# Altium PCB PCB1.PcbDoc (part 1 of 2)
Units mil, origin at the board's own origin, x right, y up, seen from the top; angles counter-clockwise.
Board outline 3190 x 3156 mil, 4 copper layers (Component Side, Ground Plane, Power Plane, Solder Side), stack 33.234 mil thick; 104 components, 96 nets, 451 pads, 130 vias.
Unrouted connection lines stored in the file: 23.
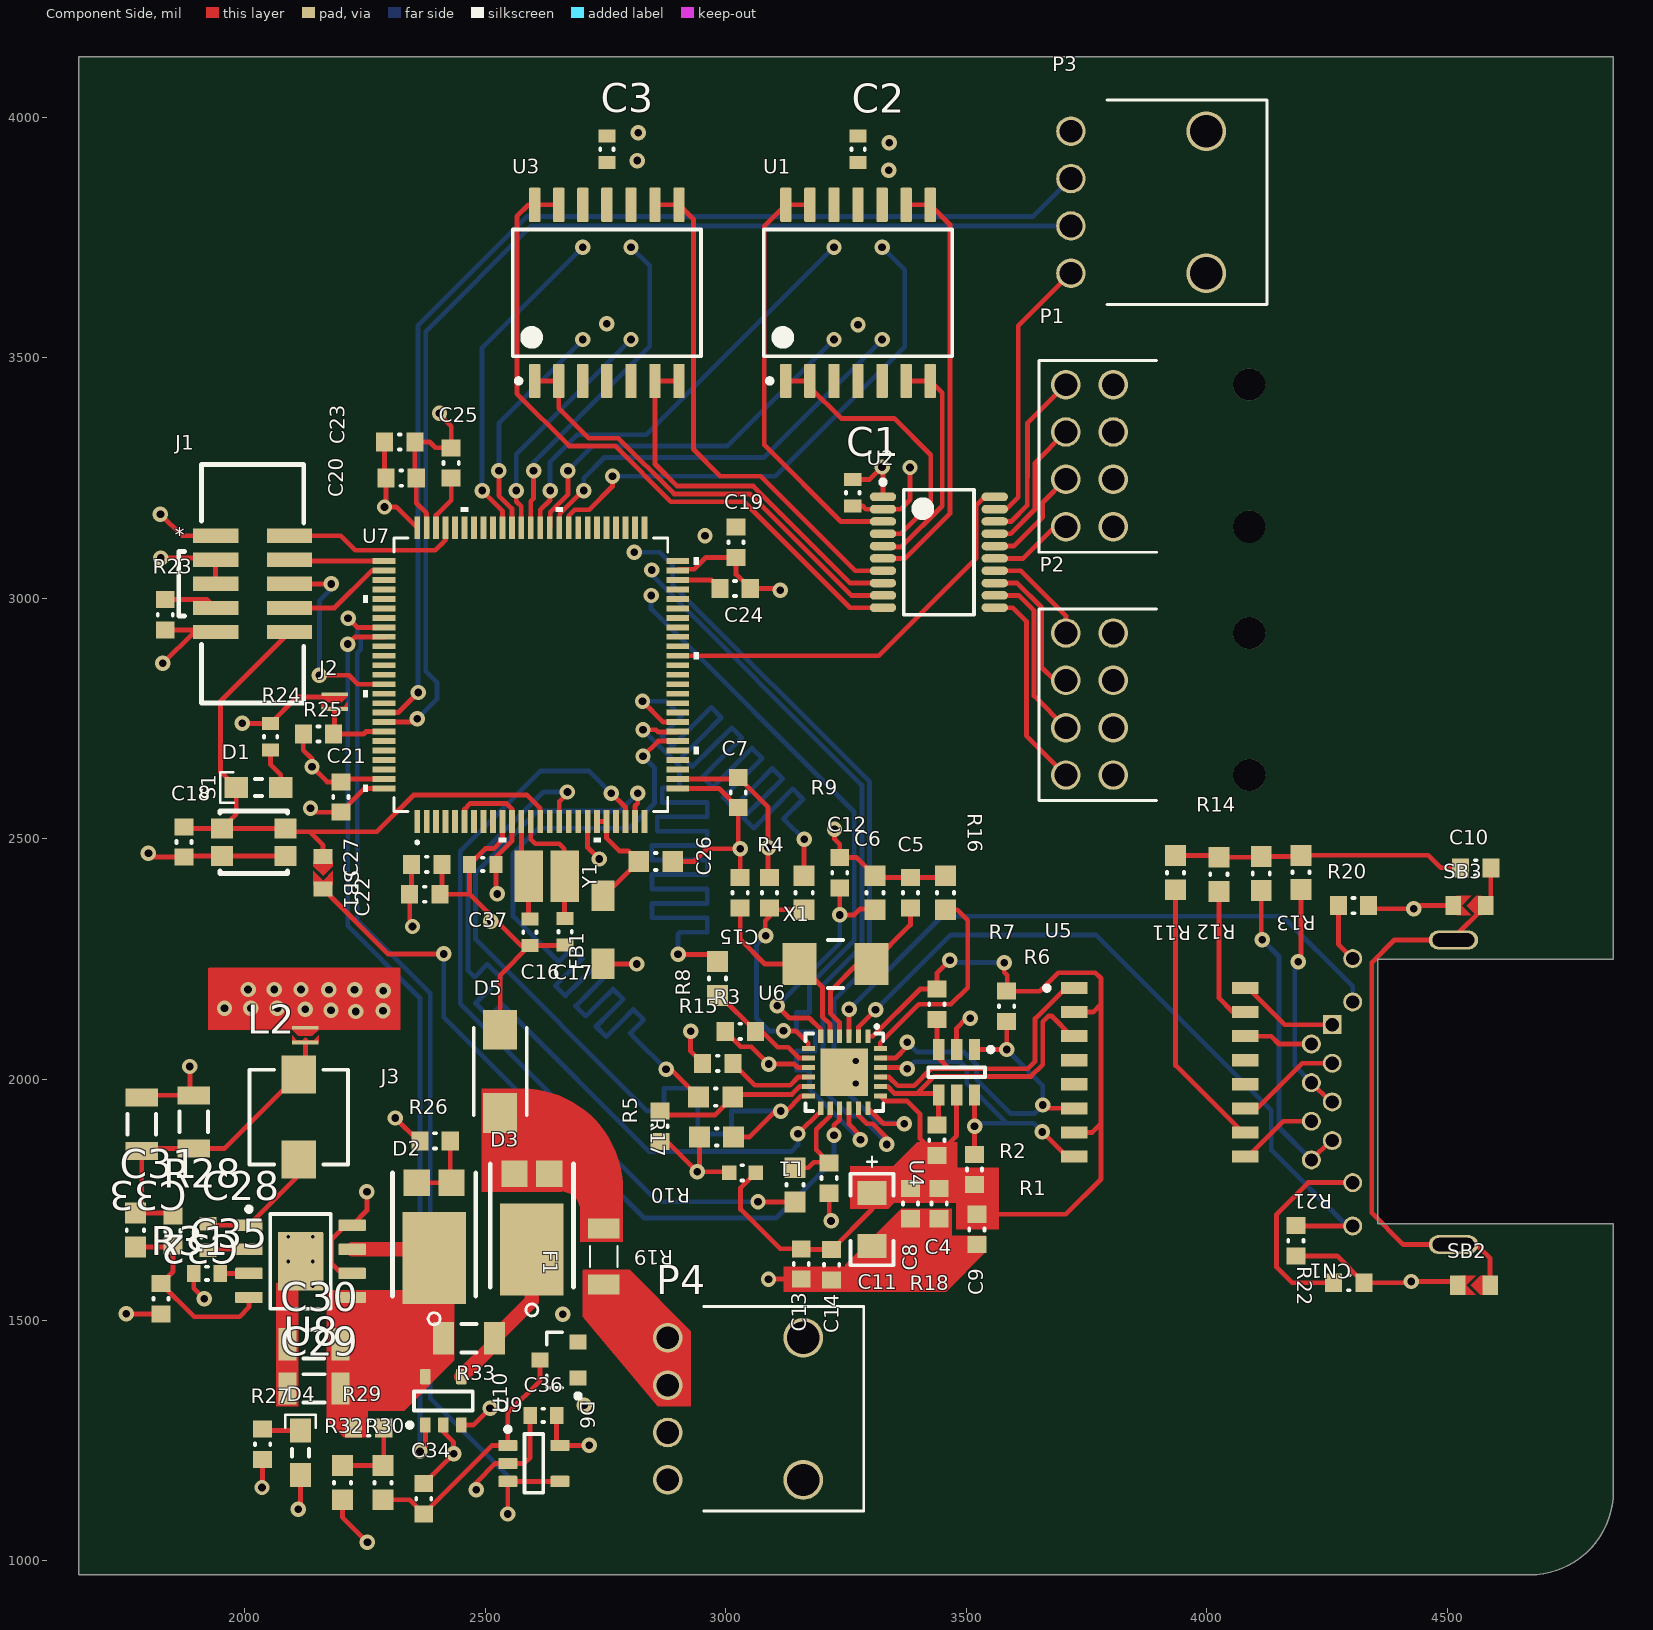
[diagram p0: Component Side view]
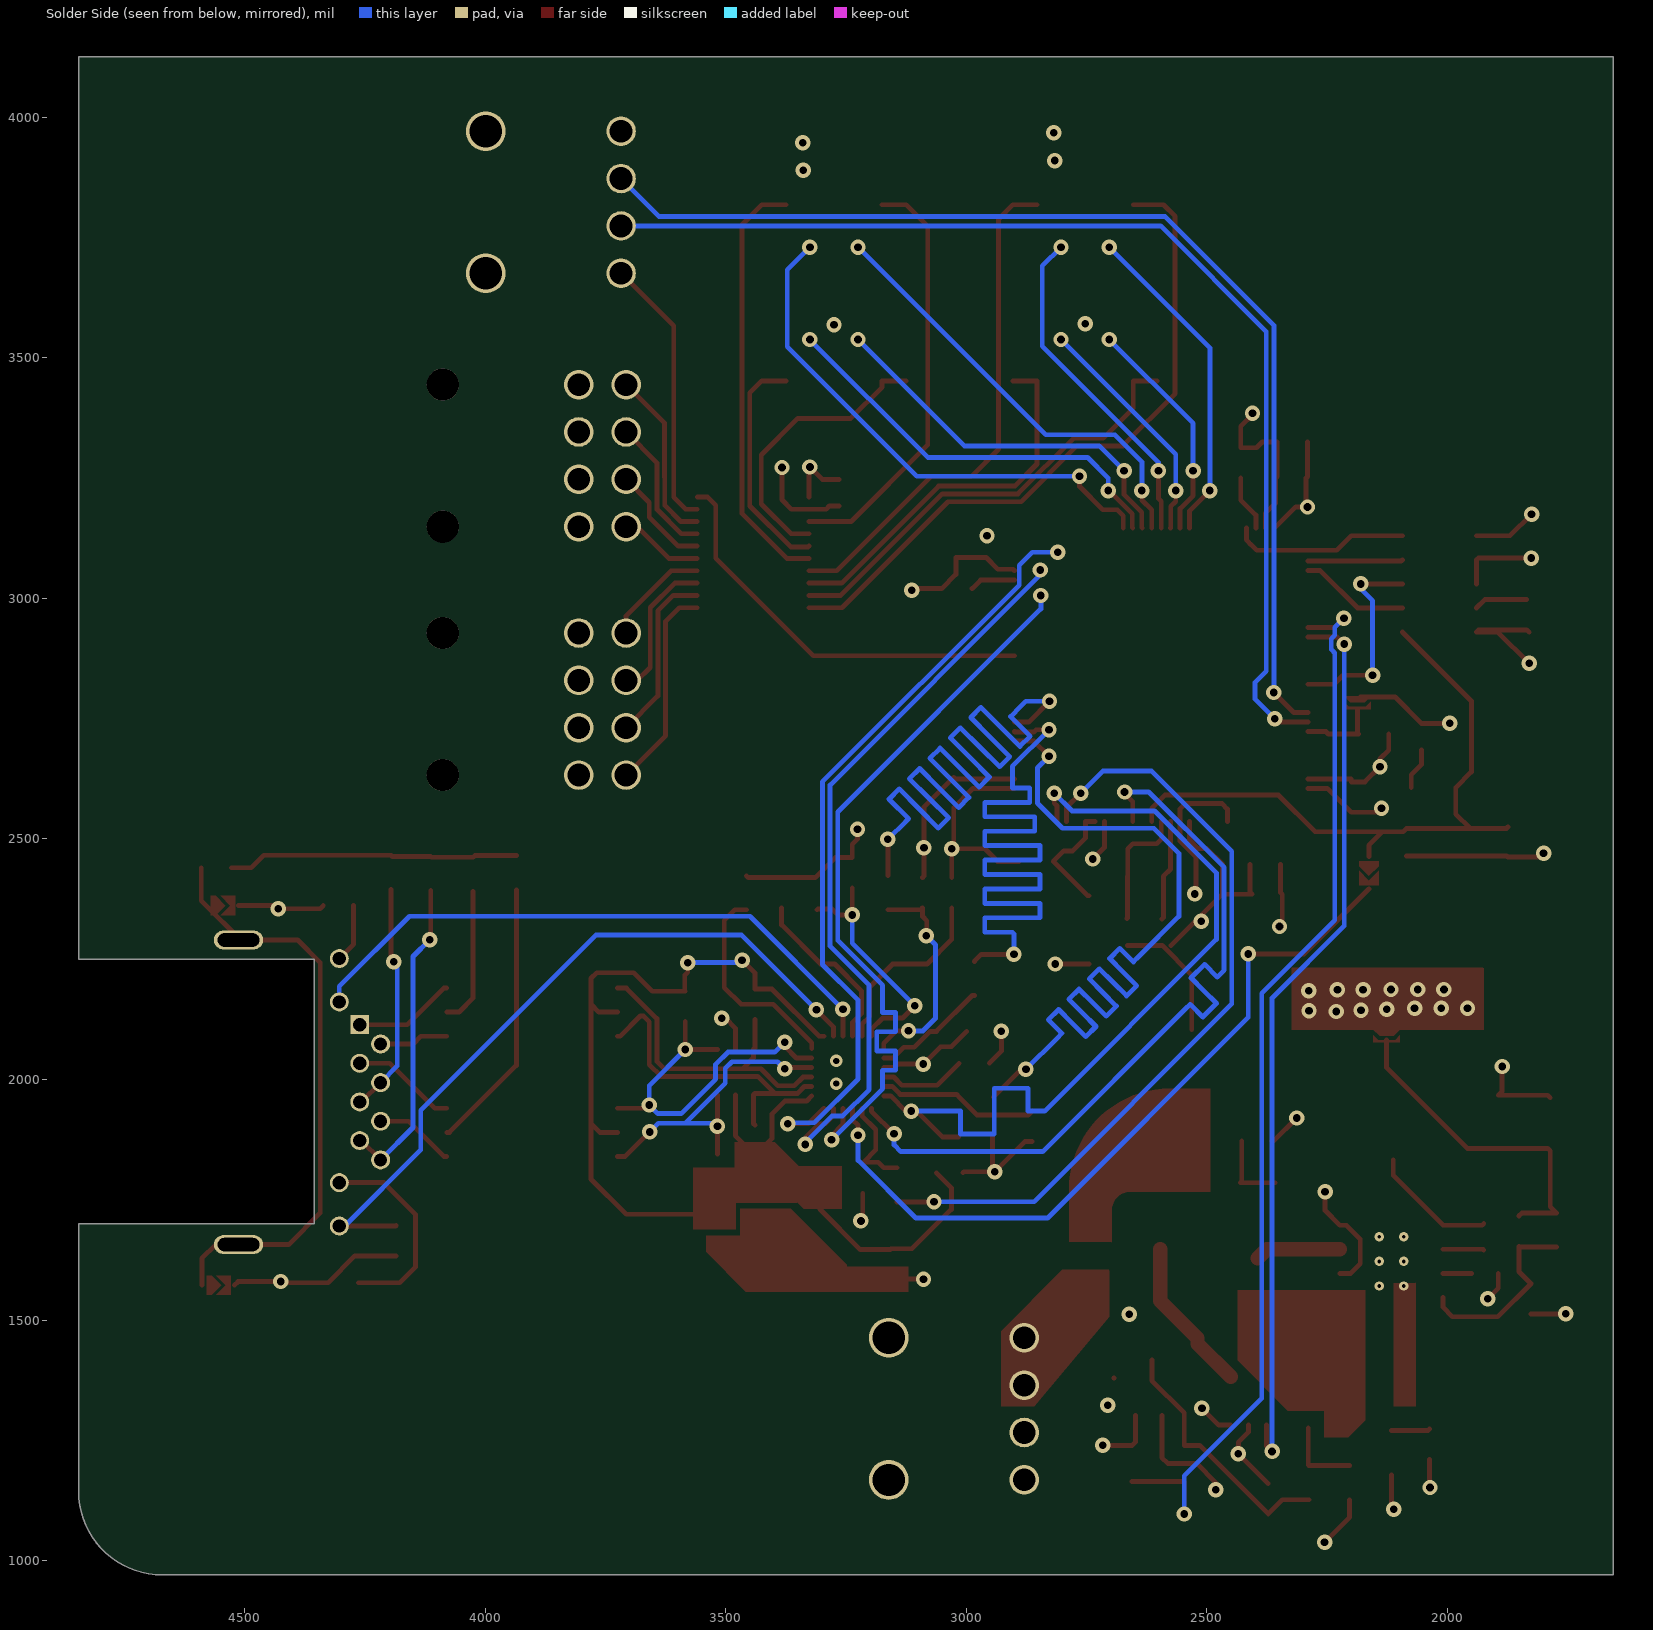
[diagram p1: Solder Side view, seen from below]
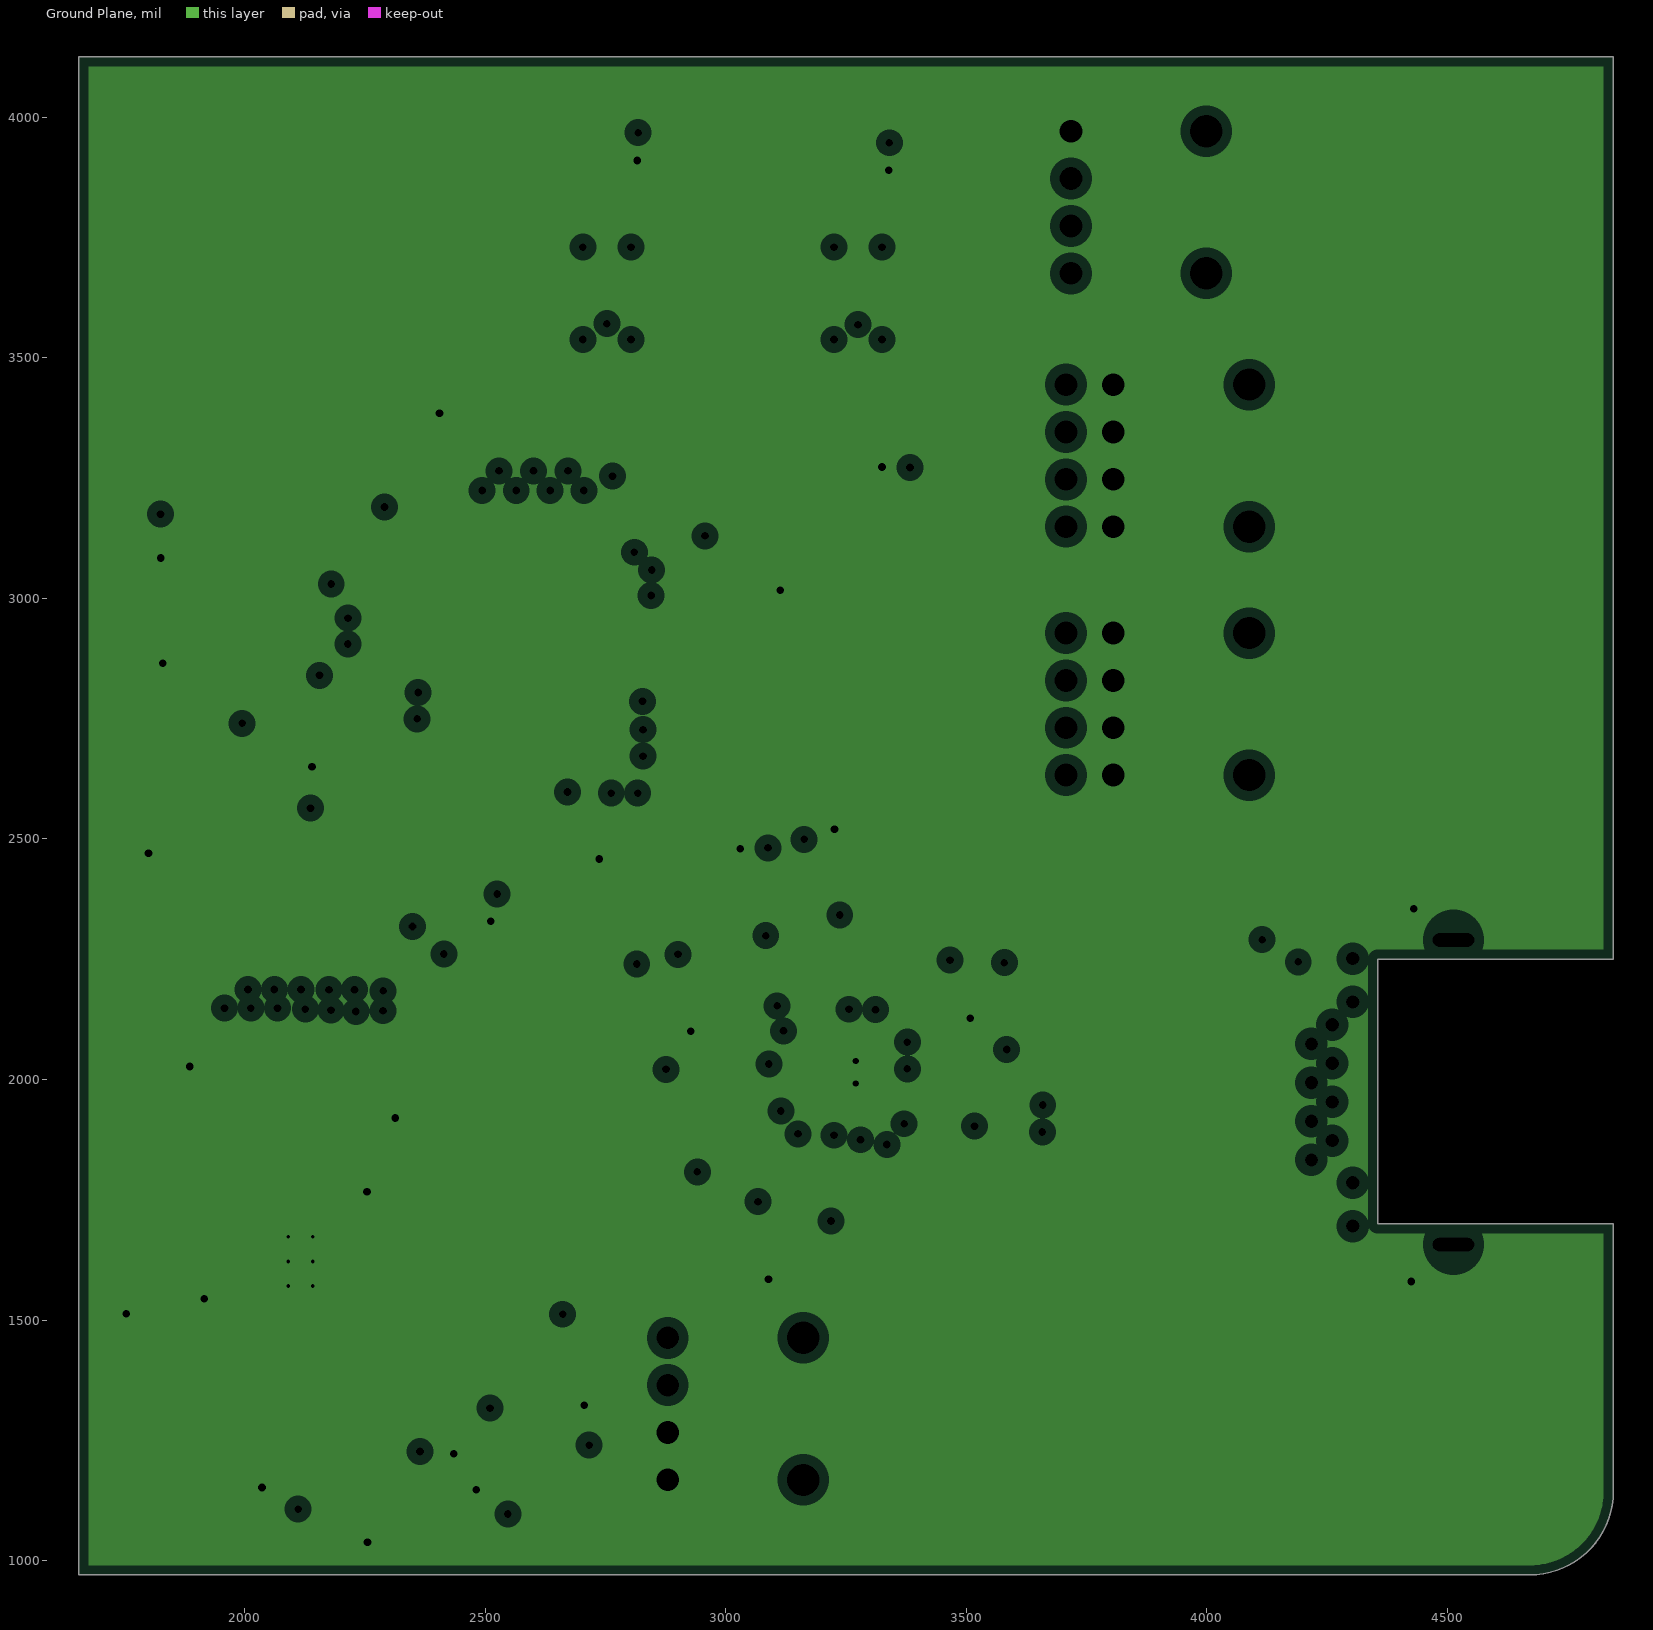
[diagram p2: Ground Plane, clearances drawn from the general rule]
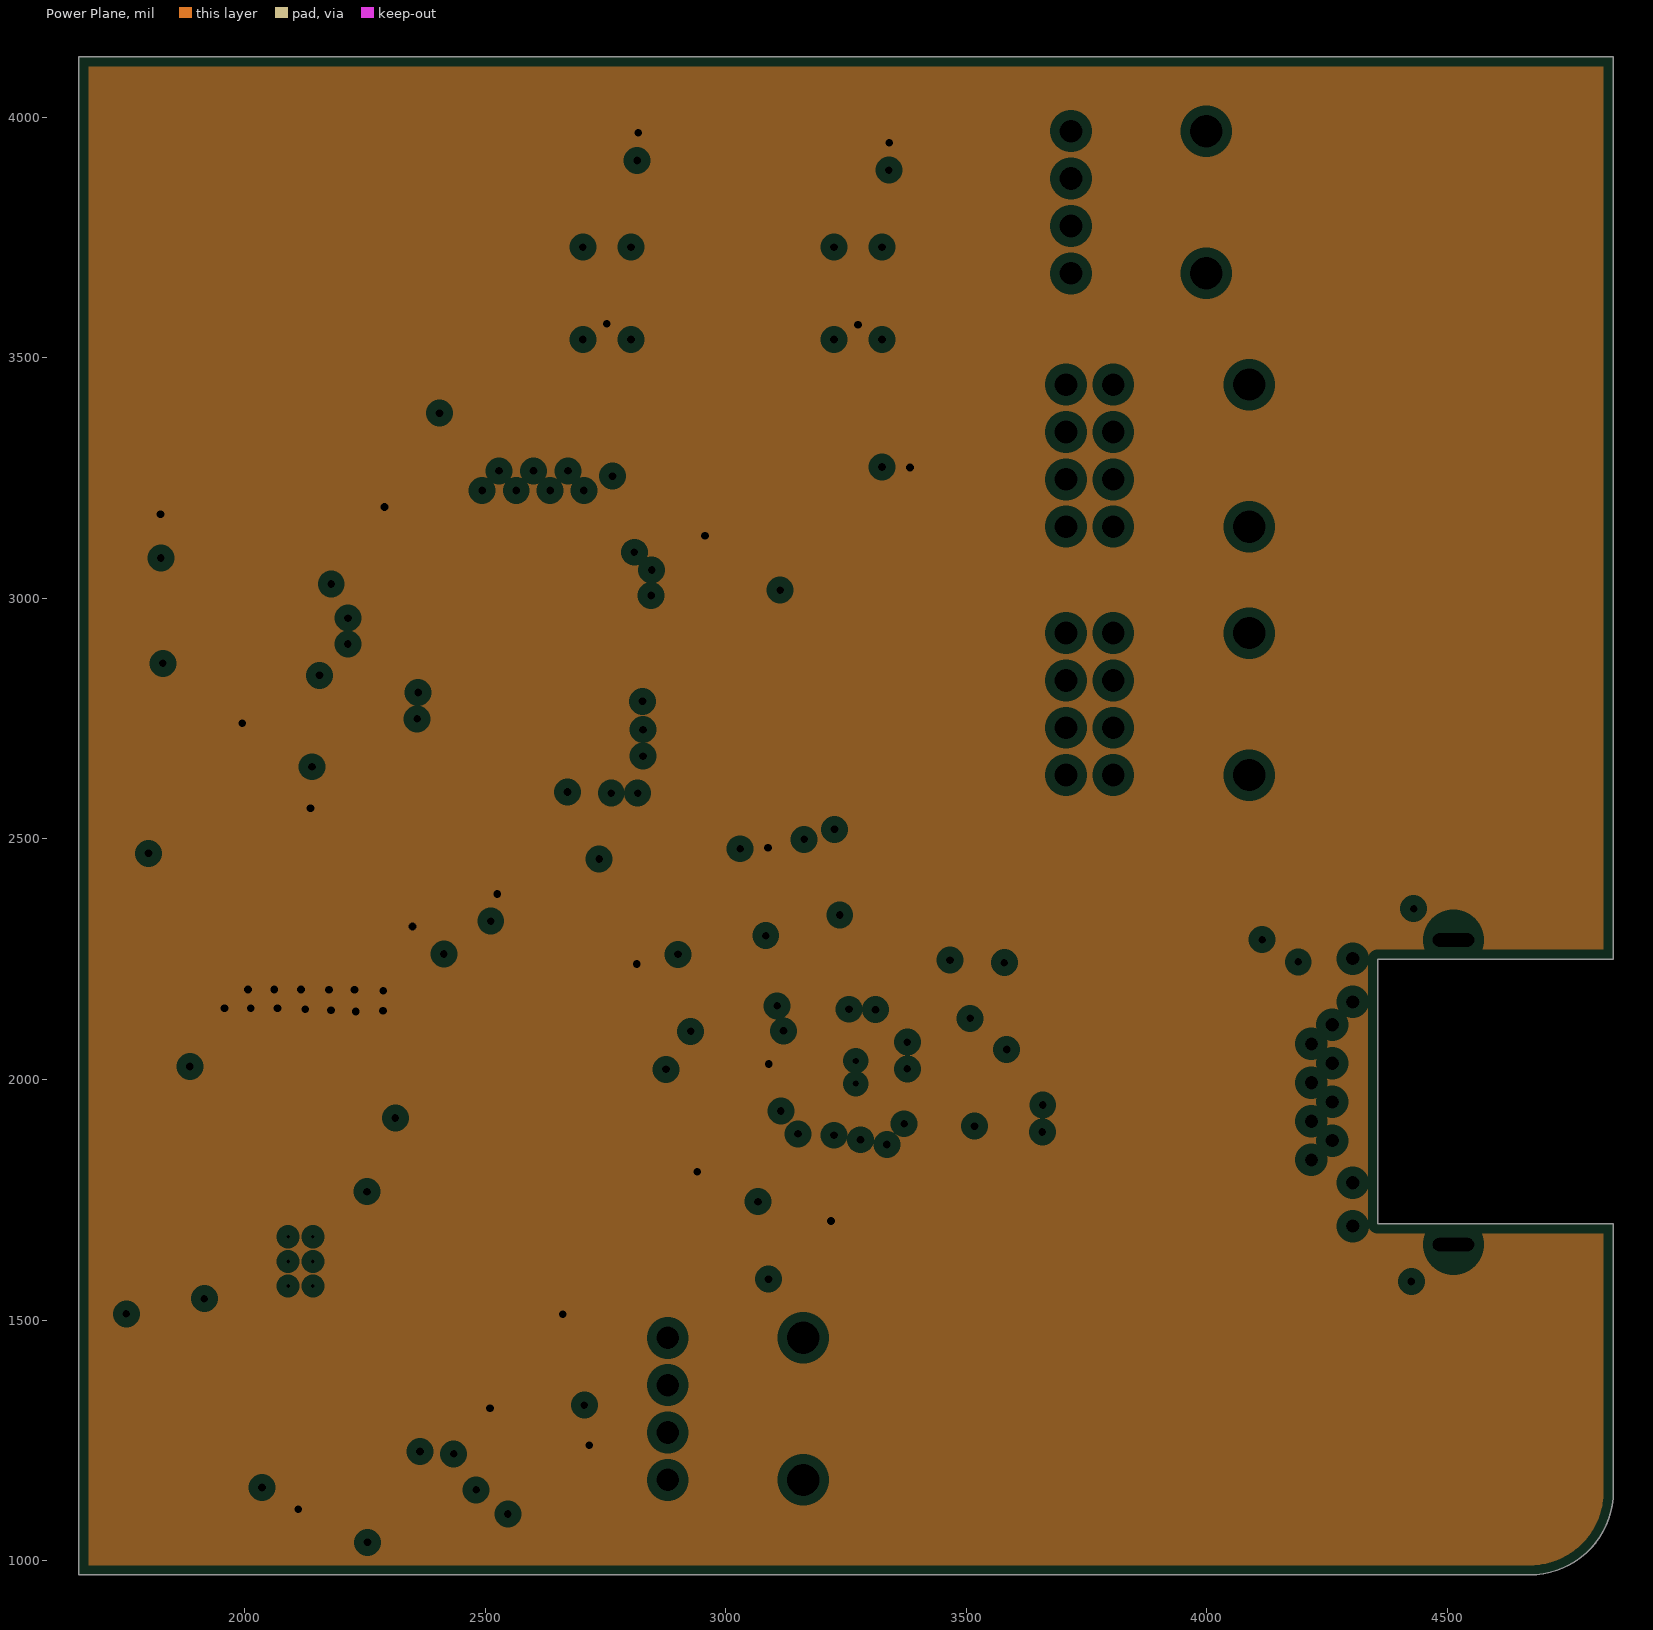
[diagram p3: Power Plane, clearances drawn from the general rule]

## Layer stack, top to bottom
Top Solder: solder mask 0.4, Solder Resist, Dk 3.5
Component Side: signal copper 1.4
Dielectric 1: core 12.6, FR-4, Dk 4.8
Ground Plane: plane copper 1.417, net GND
Dielectric 3: prepreg 5, Dk 4.2
Power Plane: plane copper 1.417, net VCC_3V3
Dielectric 4: core 10, Dk 4.2
Solder Side: signal copper 1.4
Bottom Solder: solder mask 0.4, Solder Resist, Dk 3.5

## Board outline
4845,1700 4355,1700 4355,2250 4845,2250 4845,4126 1655,4126 1655,970 4671,970 ccw(c4671,1144) 4845,1144

## Design rules (kind name [scope] priority, off if disabled: settings)
Clearance [All] p1: gap=0 ignorepadtopadclearanceinfootprint=TRUE except(6: Arc-Arc Arc-Track Arc-SMDPad Arc-Via Track-Track Track-SMDPad Track-Via SMDPad-SMDPad SMDPad-Via; 7: THPad-Fill THPad-Poly THPad-Region Via-Fill Via-Poly Via-Region; 10: Arc-THPad Arc-Text Track-THPad Track-Text SMDPad-THPad SMDPad-Text THPad-THPad THPad-Via THPad-Text Via-Via Via-Text Fill-Text Poly-Text Region-Text Text-Text)
DiffPairsRouting [All] p1: maxlimit=10 minlimit=5 mostfreqgap=10 toplayer_prefgap=6 toplayer_minwidth=10 toplayer_maxwidth=15 toplayer_prefwidth=10 bottomlayer_minwidth=10 bottomlayer_maxwidth=15 bottomlayer_prefwidth=10 maxuncoupledlength=500
MatchedLengths MatchLengths_xSignals_U5_U4_1 [InxSignalClass('xSignals_U5_U4_MatchLengthsClass')] p1: tolerance=100 checknetsindiffpair=FALSE checkdiffpairvsdiffpair=TRUE checkxsignals=TRUE checkothers=TRUE
MatchedLengths MatchLengths_xSignals_U4_U5 [InxSignalClass('xSignals_U4_U5_MatchLengthsClass')] p2: tolerance=100 checknetsindiffpair=FALSE checkdiffpairvsdiffpair=TRUE checkxsignals=TRUE checkothers=TRUE
MatchedLengths MatchLengths_xSignals_U5_U4 [InxSignalClass('xSignals_U5_U4_MatchLengthsClass')] p3: tolerance=100 checknetsindiffpair=FALSE checkdiffpairvsdiffpair=TRUE checkxsignals=TRUE checkothers=TRUE
MatchedLengths "Schematic Matched Net Lengths_7" [InNet('RD_N')] p4: tolerance=100 checknetsindiffpair=TRUE checkdiffpairvsdiffpair=FALSE checkxsignals=FALSE checkothers=FALSE
MatchedLengths "Schematic Matched Net Lengths_6" [InNet('TD_P')] p5: tolerance=100 checknetsindiffpair=TRUE checkdiffpairvsdiffpair=FALSE checkxsignals=FALSE checkothers=FALSE
MatchedLengths "Schematic Matched Net Lengths_4" [InNet('TD_N')] p6: tolerance=100 checknetsindiffpair=TRUE checkdiffpairvsdiffpair=FALSE checkxsignals=FALSE checkothers=FALSE
PlaneClearance [All] p1: clearance=20
PlaneConnect [All] p1: planeconnectstyle=Direct reliefexpansion=20 reliefentries=4 reliefconductorwidth=10 reliefairgap=10
PolygonConnect [All] p1: connectstyle=Relief reliefconductorwidth=10 reliefentries=4 polygonreliefangle="90 Angle" airgapwidth=10
RoutingVias "routing Vias" [All] p1: holewidth=16 width=32 viastyle="Through Hole" minholewidth=16 minwidth=32 maxholewidth=16 maxwidth=32
SolderMaskExpansion [All] p1: expansion=4
Width [All] p1: maxlimit=30 minlimit=10 preferedwidth=10
27 further rules are at their usual default settings.

## Classes and differential pairs
component class Ethernet_Rev: C4 C5 C6 C7 C8 C9 C10 C11 C12 C13 C14 C15 CN1 L1 R1 R2 R3 R4 R5 R6 R7 R8 R9 R10 R11 R12 R13 R14 R15 R16 R17 R18 R19 R20 R21 R22 R34 R35 R36 R37 SB1 SB2 SB3 U4 U5 U6 U11 U12 X1
component class ESC_IMU: C1 C2 C3 P1 P2 P3 U1 U2 U3
component class Power: C28 C29 C30 C31 C32 C33 C34 C35 C36 C37 D2 D3 D4 D5 D6 F1 J3 L2 R26 R27 R28 R29 R30 R31 R32 R33 U8 U9 U10
component class "MCU Power": C19 C20 C21 C22 C23 C24 C25 C26 C27 FB1
component class MCU: C16 C17 C18 D1 J1 J2 R23 R24 R25 S1 U7 Y1
component class Interface: P4
differential pair TD: +TD_P -TD_N
differential pair RD: +RD_P -RD_N

## Components (designator, comment, footprint, x,y, rotation, side; value= is the part's Value field where it differs from the comment)
C1 "CAP 100nF 100V 0603(1608)" CAPC0603(1608)100_L 3264,3219.56 r90 top value=100nF
C2 "CAP 100nF 100V 0603(1608)" CAPC0603(1608)100_L 3275,3933.44 r270 top value=100nF
C3 "CAP 100nF 100V 0603(1608)" CAPC0603(1608)100_L 2753,3933.44 r270 top value=100nF
C4 "CAP 100nF 25V 0603(1608)" CAPC0603(1608)100_N 3443.7,1742 r270 top value=100nF
C5 "CAP 30pF 25V 0603(1608)" CAPC0603(1608)100_N 3384,2388.06 r270 top value=30pF
C6 "CAP 470pF 25V 0603(1608)" CAPC0603(1608)100_M 3310.17,2388.06 r270 top value=470pF
C7 "CAP 100nF 25V 0603(1608)" CAPC0603(1608)100_N 3026.02,2596.54 r90 top value=100nF
C8 "CAP 100nF 25V 0603(1608)" CAPC0603(1608)100_N 3384,1742 r90 top value=100nF
C9 "CAP 100nF 25V 0603(1608)" CAPC0603(1608)100_N 3522,1688.31 r90 top value=100nF
C10 "CAP 100nF 25V 0603(1608)" CAPC0603(1608)100_N 4558.75,2440 r180 top value=100nF
C11 "10uF" TAN-A 3304,1708.98 r90 top
C12 "1uF_X5R_0603" 0603C 3237,2429.7 r90 top value=1µF
C13 "CAP 100nF 25V 0603(1608)" CAPC0603(1608)100_N 3157,1616.5 r90 top value=100nF
C14 "CAP 100nF 25V 0603(1608)" CAPC0603(1608)100_N 3220.3,1615 r90 top value=100nF
C15 "CAP 30pF 25V 0603(1608)" CAPC0603(1608)100_N 3030,2388.06 r270 top value=30pF
C16 "CAP 4.3pF 25V 0603(1608)" CAPC0603(1608)100_L 2592.91,2306.2 r90 top value=4.3pF
C17 "CAP 4.3pF 25V 0603(1608)" CAPC0603(1608)100_L 2666.22,2306.97 r90 top value=4.3pF
C18 "100nF" CAPC0603(1608)100_N 1873.98,2493.59 r90 top
C19 "100nF" CAPC0603(1608)100_N 3021.42,3116.5 r90 top
C20 "100nF" CAPC0603(1608)100_N 2325.24,3250 r180 top
C21 "100nF" CAPC0603(1608)100_N 2200,2587.04 r270 top
C22 "100nF" CAPC0603(1608)100_N 2378.5,2447 r180 top
C23 "100nF" CAPC0603(1608)100_N 2322.28,3325 r180 top
C24 "CAP 2.2uF 10V 0603(1608)" CAPC0603(1608)100_N 3019.45,3020.39 r180 top value=2.2uF
C25 "CAP 2.2uF 10V 0603(1608)" CAPC0603(1608)100_N 2429.32,3281.5 r270 top value=2.2uF
C26 "10nF" CAPC0603(1608)100_M 2854.57,2453.23 r0 top
C27 "10uF" CAPC0603(1608)100_N 2374.57,2385 r180 top
C28 "CAP 100nF 100V 0603(1608)" CAPC0603(1608)100_L 1924.33,1672.8 r270 top value=100nF
C29 "CAP 4.7uF 35V 1206(3216)" CAPC1206(3216)190_L 2144.1,1357.9 r0 top value=4.7uF
C30 "CAP 4.7uF 35V 1206(3216)" CAPC1206(3216)190_L 2143.78,1449.78 r0 top value=4.7uF
C31 "CAP 33pF 50V 0603(1608)" CAPC0603(1608)100_M 1772.9,1686.9 r90 top value=33pF
C32 "CAP 4.7uF 35V 1206(3216)" CAPC1206(3216)190_L 1894.4,1911.9 r270 top value=4.7uF
C33 "CAP 4.7uF 35V 1206(3216)" CAPC1206(3216)190_L 1786.22,1906.9 r270 top value=4.7uF
C34 "CAP 47nF 100V 0603(1608)" CAPC0603(1608)100_N 2372.36,1128.39 r270 top value=47nF
C35 "CAP 1uF 25V 0603(1608)" CAPC0603(1608)100_L 1921.96,1596.9 r0 top value=1uF
C36 "CAP 100nF 100V 0603(1608)" CAPC0603(1608)100_L 2621,1301.9 r180 top value=100nF
C37 "CAP 100nF 100V 0603(1608)" CAPC0603(1608)100_L 2495,2447 r0 top value=100nF
CN1 "KRJ-CB4.2GYZNL" RJ45_KRJ-CB4.2GYZNL 4364.98,1973.35 r90 top
D1 "LED RED" LED_0805 2028.74,2606.72 r0 top
D2 "LED GREEN" SBRT15U50SP5-13 2393.91,1628.63 r180 top
D3 "SBRT15U50SP5-13" SBRT15U50SP5-13 2597.13,1646.9 r180 top
D4 "LED GREEN" LED_0805 2116.22,1224.04 r270 top
D5 "SMAJ30CA" LFUS-DO-214AC-A-2_V 2531.22,2016.9 r90 top
D6 "BAS40-04LT1" ONSC-SOT-23-3-318-08_V 2653.58,1416.9 r180 top
F1 "0466.500NR" 0466.500NR 2746.22,1631.9 r90 top
FB1 "BLM31PG601SN1L" MURA-BLM31-B-CHIP-2_V 2745,2311.14 r90 top
J1 "JTAG 10POS 1.27" "5x2 JTAG SMD" 1847.23,2778.43 r0 top
J2 "(Open)" "Solder Jumper" 2186.93,2770 r90 top
J3 "(Open)" "Solder Jumper" 2126.22,2076.9 r90 top
L1 "BEAD" 0603L 3034.5,1806 r0 top value=100uH
L2 "6.8uH" "BOURNS SRP5030T" 2112.48,1921.9 r90 top
P1 "8-Pin 4x2 Molex Nano-Fit" "MOLEX NANO-FIT 2x4" 3707.06,3444.28 r270 top
P2 "8-Pin 4x2 Molex Nano-Fit" "MOLEX NANO-FIT 2x4" 3707.06,2927.92 r270 top
P3 "4-Pin Molex Nano-Fit" "MOLEX NANO-FIT 1X4" 3717.5,3675.72 r90 top
P4 "4-Pin Molex Nano-Fit" "MOLEX NANO-FIT 1X4" 2879.5,1167.72 r90 top
R1 "50" 0603R 3517.22,1813 r270 top
R2 "50" 0603R 3439,1873.5 r270 top
R3 "10K 1% 0603(1608)" RESC0603(1608)_N 3030.5,2100 r180 top value="10000.00 Ohm"
R4 "10K 1% 0603(1608)" RESC0603(1608)_N 3091,2388.06 r90 top value="10000.00 Ohm"
R5 "10K 1% 0603(1608)" RESC0603(1608)_N 2863,1902.8 r270 top value="10000.00 Ohm"
R6 "50" 0603R 3584,2152 r90 top
R7 "50" 0603R 3439,2156.5 r90 top
R8 "33R 5% 0603(1608)" RESC0603(1608)_M 2983,2210 r270 top value="33.00 Ohm"
R9 "33R 5% 0603(1608)" RESC0603(1608)_M 3163,2388.06 r270 top value="33.00 Ohm"
R10 "10K 1% 0603(1608)" RESC0603(1608)_N 2983.5,2033.58 r0 top value="10000.00 Ohm"
R11 "75R 1% 0603(1608)" RESC0603(1608)_M 3935,2429.89 r270 top value="75.00 Ohm"
R12 "75R 1% 0603(1608)" RESC0603(1608)_M 4025,2426.36 r270 top value="75.00 Ohm"
R13 "75R 1% 0603(1608)" RESC0603(1608)_M 4195.78,2430.43 r270 top value="75.00 Ohm"
R14 "75R 1% 0603(1608)" RESC0603(1608)_M 4113.15,2427.92 r270 top value="75.00 Ohm"
R15 "33R 5% 0603(1608)" RESC0603(1608)_M 2979.03,1963.23 r0 top value="33.00 Ohm"
R16 "12K1 1% 0603(1608)" RESC0603(1608)_M 3457,2388.06 r90 top value="12100.00 Ohm"
R17 "1K5 5% 0603(1608)" RESC0603(1608)_M 2981.03,1880.23 r0 top value="1500.00 Ohm"
R18 "10K 1% 0603(1608)" RESC0603(1608)_N 3215,1795 r90 top value="10000.00 Ohm"
R19 "33R 5% 0603(1608)" RESC0603(1608)_M 3144,1781 r90 top value="33.00 Ohm"
R20 "270R 5% 0603(1608)" RESC0603(1608)_N 4305,2361.38 r180 top value="270.00 Ohm"
R21 "270R 5% 0603(1608)" RESC0603(1608)_N 4185,1664.69 r90 top value="270.00 Ohm"
R22 "270R 5% 0603(1608)" RESC0603(1608)_N 4295,1577.41 r180 top value="270.00 Ohm"
R23 "10K" RESC0603(1608)_N 1835,2966.02 r90 top value="10000.00 Ohm"
R24 "100R" RESC0603(1608)_L 2053.9,2712.56 r90 top value="100.00 Ohm"
R25 "10K" RESC0603(1608)_N 2153.46,2718.11 r180 top value="10000.00 Ohm"
R26 "12K" RESC0603(1608)_N 2395.88,1872.25 r0 top value="100.00 Ohm"
R27 "1K65" RESC0603(1608)_N 2037.48,1241.9 r90 top value="100.00 Ohm"
R28 "51K 1% 0603(1608)" RESC0603(1608)_N 1851.22,1684.89 r90 top value="51000.00 Ohm"
R29 "10K 1% 0603(1608)" RESC0603(1608)_N 2257.72,1275.35 r180 top value="10000.00 Ohm"
R30 "110K 5% 0603(1608)" RESC0603(1608)_M 2287.69,1161.9 r270 top value="110000.00 Ohm"
R31 "22K1 1% 0603(1608)" RESC0603(1608)_N 1826.22,1544.3 r90 top value="22100.00 Ohm"
R32 "1K 1% 0603(1608)" RESC0603(1608)_M 2203.23,1161.9 r90 top value="1000.00 Ohm"
R33 "" C1206 2466.22,1461.9 r180 top value=1R
S1 "tact switch" EVP-AA202K 2018.86,2493.23 r0 top
SB1 "Closed" SB_0603 2163,2429.61 r90 top
SB2 "Open" SB_0603 4555,1572.41 r0 top
SB3 "Open" SB_0603 4546.25,2361.38 r0 top
U1 "LM124AWG/883" NAC0014A_L 3275,3635 r90 top
U2 "Logic Level Shifter" TSOP65P640X120-20N 3443,3095.83 r0 top
U3 "LM124AWG/883" NAC0014A_L 2753,3635 r90 top
U4 "USBLC6-4SC6" SOT23-6L 3479.82,2015 r270 top
U5 "KMS-1102NL" Transformer 3902.44,2015 r270 top
U6 "LAN8742A-CZ-TR" QFN24_0R5_4X4 3246.51,2015 r270 top
U7 "STM32H7x3VIT" LQFP100-14x14mm 2594.88,2841.26 r90 top value=Value
U8 "LMR23630-Q1" DDA0008E_N 2116.22,1621.9 r0 top
U9 "LMV321M5X" DBV0005A_N 2601.22,1201.9 r0 top
U10 "INA196AIDBVR" DBV0005A_L 2413.07,1331.9 r90 top
X1 "X53T-C20SSA-25.000MHz" XTAL_2SM_5R0X3R2 3228,2240 r0 top
Y1 "NX3225GD-8MHZ-STD-CRA-3" NDK-NX3225GD-8MHZ-STD-CRA-3_V 2627.6,2422.42 r0 top

## Footprints (in the part's own frame and the unit in brackets; to place one, negate y for a bottom-side part, rotate by r counter-clockwise, add the part's x,y. Pads: shape width x height; smd on the part's side, far side on the other; paste and mask are expansions set on the pad)
"5x2 JTAG SMD" [mm]
  rect 2.4x0.76 smd: 1(2.35,8.93) 2(6.25,8.93) 3(2.35,7.66) 4(6.25,7.66) 5(2.35,6.39) 6(6.25,6.39) 7(2.35,5.12) 8(6.25,5.12) 9(2.35,3.85) 10(6.25,3.85)
  silkscreen extent 0.4,0.1 7,12.7, body extent 1.55,0.07 7.05,12.72, height 5.6
0466.500NR [mm] ", 2-Leads, Body 3.18x1.52mm, IPC Medium Density"
  rect 1.05x1.65 smd: 1(-1.475,0) 2(1.475,0)
  silkscreen extent -0.55,-0.72 0.55,0.72, body extent -1.59,-0.76 1.59,0.76, height 0.58
0603C [mm] "Chip Capacitor, Body 1.6x0.8mm, Height 1.0mm, IPC Medium Density"
  rect 0.9x1 smd: 1(-0.8,0) 2(0.8,0)
  silkscreen extent -0.05,-0.4 0.05,0.4, body extent -0.87,-0.48 0.88,0.47, height 1
0603L [mil] "Bead 0603L"
  rect 30x30 smd: 1(27.5,0) 2(-27.5,0)
  silkscreen extent -2,-16 2,16, body extent -34,-19 34,19, height 24
0603R [mm] "Chip Resistor, Body 1.6x0.8mm, IPC Medium Density"
  rect 0.9x1 smd: 1(-0.8,0) 2(0.8,0)
  silkscreen extent -0.05,-0.4 0.05,0.4, body extent -0.85,-0.47 0.85,0.47, height 0.6
"BOURNS SRP5030T" [mm] "Precision Wire Wound Inductor, 2-Leads, Body 5.70x5.20mm, IPC Medium Density"
  rect 2x1.8 smd: 1(-2.25,0) 2(2.25,0)
  silkscreen extent -2.5,-2.6 2.5,2.6, body extent -2.85,-2.6 2.85,2.6, height 3
C1206 [mm] "Chip Capacitor, Body 3.2x1.6mm, IPC High Density"
  rect 1.1x1.7 smd: 1(-1.35,0) 2(1.35,0)
  silkscreen extent -0.4,-0.75 0.4,0.75, body extent -1.7,-0.9 1.7,0.9, height 1.3
CAPC0603(1608)100_L [mm] "Chip Capacitor, Body 1.6x0.8mm, Height 1.0mm, IPC High Density"
  rect 0.7x0.9 smd: 1(-0.7,0) 2(0.7,0)
  silkscreen extent -0.05,-0.35 0.05,0.35, body extent -0.87,-0.47 0.88,0.48, height 1
CAPC0603(1608)100_M [mm] "Chip Capacitor, Body 1.6x0.8mm, Height 1.0mm, IPC Low Density"
  rect 1.1x1.1 smd: 1(-0.9,0) 2(0.9,0)
  silkscreen extent -0.05,-0.45 0.05,0.45, body extent -0.87,-0.47 0.88,0.48, height 1
CAPC0603(1608)100_N [mm] "Chip Capacitor, Body 1.6x0.8mm, Height 1.0mm, IPC Medium Density"
  rect 0.9x1 smd: 1(-0.8,0) 2(0.8,0)
  silkscreen extent -0.05,-0.4 0.05,0.4, body extent -0.87,-0.48 0.88,0.47, height 1
CAPC1206(3216)190_L [mm] "Chip Capacitor, Body 3.2x1.6mm, Height 1.9mm, IPC High Density"
  rect 0.95x1.7 smd: 1(-1.4,0) 2(1.4,0)
  silkscreen extent -0.55,-0.75 0.55,0.75, body extent -1.7,-0.9 1.7,0.9, height 1.9
DBV0005A_L [mm] "SOT23, 5-Leads, Body 3.05x1.75mm, Pitch 0.95mm, IPC High Density"
  rrect18% 0.8x0.55 smd: 1(-1.275,0.95) 2(-1.275,0) 3(-1.275,-0.95) 4(1.275,-0.95) 5(1.275,0.95)
  silkscreen extent -1.4,-1.55 0.5,1.9, body extent -1.42,-1.46 1.42,1.46, height 1.08
DBV0005A_N [mm] "SOT23, 5-Leads, Body 3.05x1.75mm, Pitch 0.95mm, IPC Medium Density"
  rrect17% 1x0.6 smd: 1(-1.375,0.95) 2(-1.375,0) 3(-1.375,-0.95) 4(1.375,-0.95) 5(1.375,0.95)
  silkscreen extent -1.5,-1.55 0.5,1.92, body extent -1.42,-1.46 1.42,1.46, height 1.08
DDA0008E_N [mm] "SOP, 8-Leads, Body 4x5mm, Pitch 1.27mm, Thermal Pad 2.4x3.1mm, IPC Medium Density"
  rrect17% 1.45x0.6 smd: 1(-2.725,1.905) 2(-2.725,0.635) 3(-2.725,-0.635) 4(-2.725,-1.905) 5(2.725,-1.905) 6(2.725,-0.635) 7(2.725,0.635) 8(2.725,1.905)
  rrect4% 2.4x3.1 smd: 9(0,0)
  silkscreen extent -2.85,-2.5 1.6,2.88, body extent -2.98,-2.45 2.98,2.45, height 1.5
EVP-AA202K [mm] "Momentary Switch SMT SPST-NO EVP-AA series"
  rect 1.15x1.05 smd: 1(-1.675,0.725) 1(1.675,0.725) 2(-1.675,-0.725) 2(1.675,-0.725)
  silkscreen extent -1.78,-1.65 1.78,1.65, body extent -2.16,-1.55 2.14,1.56, height 1.7
LED_0805 [mm] "Liteon 0805 Chip LED"
  rect 1.25x1.1 smd: 1(-1.175,0) 2(1.175,0)
  silkscreen extent -2.01,-0.8 0.2,0.8, body extent -1,-0.63 1,0.63, height 0.8
LFUS-DO-214AC-A-2_V [mm] "Molded Diode, 2-Leads, Body 4.6x2.79mm"
  rect 2.1x1.8 smd: 1(-2.2,0) 2(2.2,0)
  silkscreen extent -2.3,-1.4 2.3,1.4, body extent -2.52,-1.4 2.52,1.4, height 2.29
LQFP100-14x14mm [mil]
  rect 47x12 smd: 1(-305.12,236.22) 2(-305.12,216.54) 3(-305.12,196.85) 4(-305.12,177.17) 5(-305.12,157.48) 6(-305.12,137.8) 7(-305.12,118.11) 8(-305.12,98.43) 9(-305.12,78.74) 10(-305.12,59.06) 11(-305.12,39.37) 12(-305.12,19.69) 13(-305.12,0) 14(-305.12,-19.68) 15(-305.12,-39.37) 16(-305.12,-59.06) 17(-305.12,-78.74) 18(-305.12,-98.43) 19(-305.12,-118.11) 20(-305.12,-137.8) 21(-305.12,-157.48) 22(-305.12,-177.17) 23(-305.12,-196.85) 24(-305.12,-216.54) 25(-305.12,-236.22) 51(305.12,-236.22) 52(305.12,-216.54) 53(305.12,-196.85) 54(305.12,-177.17) 55(305.12,-157.48) 56(305.12,-137.8) 57(305.12,-118.11) 58(305.12,-98.43) 59(305.12,-78.74) 60(305.12,-59.06) 61(305.12,-39.37) 62(305.12,-19.68) 63(305.12,0) 64(305.12,19.68) 65(305.12,39.37) 66(305.12,59.06) 67(305.12,78.74) 68(305.12,98.43) 69(305.12,118.11) 70(305.12,137.8) 71(305.12,157.48) 72(305.12,177.17) 73(305.12,196.85) 74(305.12,216.54) 75(305.12,236.22)
  rect 12x47 smd: 26(-236.22,-305.12) 27(-216.54,-305.12) 28(-196.85,-305.12) 29(-177.17,-305.12) 30(-157.48,-305.12) 31(-137.8,-305.12) 32(-118.11,-305.12) 33(-98.43,-305.12) 34(-78.74,-305.12) 35(-59.06,-305.12) 36(-39.37,-305.12) 37(-19.68,-305.12) 38(0,-305.12) 39(19.69,-305.12) 40(39.37,-305.12) 41(59.06,-305.12) 42(78.74,-305.12) 43(98.43,-305.12) 44(118.11,-305.12) 45(137.8,-305.12) 46(157.48,-305.12) 47(177.17,-305.12) 48(196.85,-305.12) 49(216.54,-305.12) 50(236.22,-305.12) 76(236.22,305.12) 77(216.54,305.12) 78(196.85,305.12) 79(177.17,305.12) 80(157.48,305.12) 81(137.8,305.12) 82(118.11,305.12) 83(98.43,305.12) 84(78.74,305.12) 85(59.06,305.12) 86(39.37,305.12) 87(19.69,305.12) 88(0,305.12) 89(-19.68,305.12) 90(-39.37,305.12) 91(-59.06,305.12) 92(-78.74,305.12) 93(-98.43,305.12) 94(-118.11,305.12) 95(-137.8,305.12) 96(-157.48,305.12) 97(-177.17,305.12) 98(-196.85,305.12) 99(-216.54,305.12) 100(-236.22,305.12)
  silkscreen extent -351,-349 349,349, body extent 0,0 10,10, height 10
"MOLEX NANO-FIT 1X4" [mm]
  round 1.56 hole 1.2: 1(0,0) 2(2.5,0) 3(5,0) 4(7.5,0)
  round 2.1 hole 1.7: ""(0,-7.15) ""(7.5,-7.15)
  silkscreen extent -1.65,-10.35 9.15,-1.9, body extent -2.65,-26.07 10.05,0.22, height 7.56
"MOLEX NANO-FIT 2x4" [mm] "MOLEX NANO-FIT 2X4"
  round 1.56 hole 1.2: 1(0,0) 2(2.5,0) 3(5,0) 4(7.5,0) 5(0,2.5) 6(2.5,2.5) 7(5,2.5) 8(7.5,2.5)
  round 1.7 hole 1.7: ""(0,9.68) ""(7.5,9.68)
  silkscreen extent -1.28,-1.43 8.85,4.77, body extent -2.6,-0.44 10.1,29.85, height 10.71
MURA-BLM31-B-CHIP-2_V [mm] "Chip Ferrite Bead, 2-Leads, Body 3.2x1.6mm, Height 1.3mm"
  rect 1.6x1.2 smd: 1(-1.8,0) 2(1.8,0)
  body extent -1.6,-0.8 1.6,0.8, height 1.3
NAC0014A_L [mm] "CFP, 14-Leads, Body 9.91x6.85mm, Pitch 1.27mm, IPC High Density"
  rrect17% 1.8x0.6 smd: 1(-4.65,3.81) 2(-4.65,2.54) 3(-4.65,1.27) 4(-4.65,0) 5(-4.65,-1.27) 6(-4.65,-2.54) 7(-4.65,-3.81) 8(4.65,-3.81) 9(4.65,-2.54) 10(4.65,-1.27) 11(4.65,0) 12(4.65,1.27) 13(4.65,2.54) 14(4.65,3.81)
  silkscreen extent -4.77,-4.97 3.35,4.97, body extent -3.43,-4.95 3.42,4.95, height 2.13
NDK-NX3225GD-8MHZ-STD-CRA-3_V [mm] "SMD, 2-Leads, Body 3.2x2.5mm"
  rect 1.5x2.7 smd: 1(-0.95,0) 2(0.95,0)
  body extent -1.6,-1.25 1.6,1.25, height 1
ONSC-SOT-23-3-318-08_V [mm] "SOT23, 3-Leads, Body 2.92x1.3mm, Pitch 0.95mm"
  rect 0.9x0.8 smd: 1(-1,0.95) 2(-1,-0.95) 3(1,0)
  silkscreen extent -1.13,-1.46 0.65,2.02, body extent -0.65,-1.46 0.65,1.46, height 1.11
QFN24_0R5_4X4 [mm] "SQFN 24 Pins, Pitch 0.5mm, 4mmx4mm"
  rect 0.69x0.28 smd: 1(-1.9,1.25) 2(-1.9,0.75) 3(-1.9,0.25) 4(-1.9,-0.25) 5(-1.9,-0.75) 6(-1.9,-1.25) 13(1.9,-1.25) 14(1.9,-0.75) 15(1.9,-0.25) 16(1.9,0.25) 17(1.9,0.75) 18(1.9,1.25)
  rect 0.28x0.69 smd: 7(-1.25,-1.9) 8(-0.75,-1.9) 9(-0.25,-1.9) 10(0.25,-1.9) 11(0.75,-1.9) 12(1.25,-1.9) 19(1.25,1.9) 20(0.75,1.9) 21(0.25,1.9) 22(-0.25,1.9) 23(-0.75,1.9) 24(-1.25,1.9)
  rect 2.5x2.5 smd: 25(0,0)
  silkscreen extent -2.46,-2.05 2.05,2.05, body extent -2.05,-2.05 2.05,2.05, height 1
RESC0603(1608)_L [mm] "Chip Resistor, Body 1.6x0.8mm, IPC High Density"
  rect 0.7x0.9 smd: 1(-0.7,0) 2(0.7,0)
  silkscreen extent -0.05,-0.35 0.05,0.35, body extent -0.85,-0.47 0.85,0.47, height 0.6
RESC0603(1608)_M [mm] "Chip Resistor, Body 1.6x0.8mm, IPC Low Density"
  rect 1.1x1.1 smd: 1(-0.9,0) 2(0.9,0)
  silkscreen extent -0.05,-0.45 0.05,0.45, body extent -0.85,-0.47 0.85,0.47, height 0.6
RESC0603(1608)_N [mm] "Chip Resistor, Body 1.6x0.8mm, IPC Medium Density"
  rect 0.9x1 smd: 1(-0.8,0) 2(0.8,0)
  silkscreen extent -0.05,-0.4 0.05,0.4, body extent -0.85,-0.47 0.85,0.47, height 0.6
RJ45_KRJ-CB4.2GYZNL [mm] "RJ45  connector, right angle"
  rect 1x1 hole 0.7: 1(3.57,2.65)
  round 1 hole 0.7: 2(2.55,3.75) 3(1.53,2.65) 4(0.51,3.75) 5(-0.51,2.65) 6(-1.53,3.75) 7(-2.55,2.65) 8(-3.57,3.75) 9(7.06,1.57) 10(4.77,1.57) 11(-4.77,1.57) 12(-7.06,1.57)
  oval 1x2.6 hole 0.7 slot 2.2 at 90 deg: 13(8.04,-3.75) 14(-8.04,-3.75)
  body extent -8.1,-11.75 8.08,3.47, height 6.8
SB_0603 [mil] "Jumper"
  rect 32x40 smd: 1(33.75,0) 2(-33.75,0)
  Component Side region: -26.25,0 -16.25,0 3.75,-20 -26.25,-20
  Component Side region: -26.25,0 -16.25,0 3.75,20 -26.25,20
  Component Side region: 23.75,20 13.75,20 -6.25,0 13.75,-20 23.75,-20
SBRT15U50SP5-13 [mm]
  rect 1.39x1.4 smd: 1(-0.92,-3.982) 1(0.92,-3.982)
  rect 3.36x4.86 smd: 2(0,0)
  silkscreen extent -2.2,-4.5 2.2,3.52, body extent -2,-4.6 2,2.4, height 1.05
"Solder Jumper" [mm]
  rect 0.2x1.4 smd paste+0: 1(0,0) 2(0.775,0)
  Component Side region: 0.375,-0.7 0,-0.7 0,0.7 0.375,0.7 0.125,0.45 0.125,-0.45
  Component Side region: 0.35,0.375 0.675,0.7 0.675,-0.7 0.35,-0.375
SOT23-6L [mm]
  rect 1.1x0.6 smd: 1(-1.2,0.95) 2(-1.2,0) 3(-1.2,-0.95) 4(1.2,-0.95) 5(1.2,0) 6(1.2,0.95)
  silkscreen extent -1.32,-1.5 0.25,1.93, body extent -0.86,-1.51 0.87,1.52, height 1.25
TAN-A [mil] "TAN Capacitor"
  rect 50x60 smd: 1(55,0) 2(-55,0)
  silkscreen extent -95,-45 130,45, body extent -47,-35 47,35, height 39
Transformer [mm]
  rect 0.64x1.4 smd: 1(-4.445,-4.51) 2(-3.175,-4.51) 3(-1.905,-4.51) 4(-0.635,-4.51) 5(0.635,-4.51) 6(1.905,-4.51) 7(3.175,-4.51) 8(4.445,-4.51) 9(4.445,4.51) 10(3.175,4.51) 11(1.905,4.51) 12(0.635,4.51) 13(-0.635,4.51) 14(-1.905,4.51) 15(-3.175,4.51) 16(-4.445,4.51)
  silkscreen extent -4.57,-6.09 -4.32,-5.84, body extent -6.4,-3 6.4,3, height 6
TSOP65P640X120-20N [mm] "TSOP, 20-Leads, Body 6.50x4.40mm, Pitch 0.65mm, IPC Medium Density"
  oval 1.4x0.45 smd: 1(-2.95,2.925) 2(-2.95,2.275) 3(-2.95,1.625) 4(-2.95,0.975) 5(-2.95,0.325) 6(-2.95,-0.325) 7(-2.95,-0.975) 8(-2.95,-1.625) 9(-2.95,-2.275) 10(-2.95,-2.925) 11(2.95,-2.925) 12(2.95,-2.275) 13(2.95,-1.625) 14(2.95,-0.975) 15(2.95,-0.325) 16(2.95,0.325) 17(2.95,0.975) 18(2.95,1.625) 19(2.95,2.275) 20(2.95,2.925)
  silkscreen extent -3.07,-3.3 1.85,3.82, body extent -3.2,-3.3 3.2,3.3, height 1.2
XTAL_2SM_5R0X3R2 [mm] "CRYSTAL 25M Hz  30F SMD 2 pads"
  rect 1.8x2.2 smd: 1(-1.9,0) 2(1.9,0)
  silkscreen extent -0.4,-1.27 0.4,1.27, body extent -2.5,-1.6 2.5,1.6, height 1.3

## Part data
C1 C2 C3 C28 C36 C37: library part CMP-1035-02595-1, "CAP 100nF 100V ±10% 0603 (1608 Metric) Thickness 1mm SMD", Case-EIA=0603, Case-Metric=1608, Rated Voltage="100 V", Tolerance=±10%, Max Thickness="1 mm", Technology=SMT
C4 C7 C8 C9 C10 C13 C14: library part CMP-1035-02587-1, "CAP 100nF 25V ±5% 0603 (1608 Metric) Thickness 1mm SMD", Case-EIA=0603, Case-Metric=1608, Rated Voltage="25 V", Tolerance=±5%, Max Thickness="1 mm", Technology=SMT
C5 C15: library part CMP-1035-00910-1, "CAP 30pF 25V ±5% 0603 (1608 Metric) Thickness 1mm SMD", Case-EIA=0603, Case-Metric=1608, Rated Voltage="25 V", Tolerance=±5%, Max Thickness="1 mm", Technology=SMT
C6: library part CMP-1035-01670-1, "CAP 470pF 25V ±5% 0603 (1608 Metric) Thickness 1mm SMD", Case-EIA=0603, Case-Metric=1608, Rated Voltage="25 V", Tolerance=±5%, Max Thickness="1 mm", Technology=SMT
C11: library part Cap_10uF_POL_10%_TANA, "Polarized Capacitor,10uF,10V,10%,typeA,VISHAY", Manuf_1=VISHAY, Manuf_Part_1=293D106X9010A2TE3, ECCN_US/EU=n/a, Revision="July-2002: Re-released for DXP Platform."
C12: library part "CAP SMD 0603  X5R 1µF 25V 10%", "0603  X5R 1µF", Rated Voltage=25V, Temperature Max=+125°C, Temperature Min=-55°C, Tolerance=10%, Order code Farnell=1288202RL, Technology=X5R
C16 C17: library part CMP-1035-00303-1, "CAP 4.3pF 25V ±0.5pF 0603 (1608 Metric) Thickness 1mm SMD", Case-EIA=0603, Case-Metric=1608, Rated Voltage="25 V", Tolerance=±0.5pF, Max Thickness="1 mm", Technology=SMT
C18 C19 C20 C21 C22 C23: library part CMP-1035-02580-1, "CAP 100nF 10V ±10% 0603 (1608 Metric) Thickness 1mm SMD", Case-EIA=0603, Case-Metric=1608, Rated Voltage="10 V", Tolerance=±10%, Max Thickness="1 mm", Technology=SMT
C24 C25: library part CMP-1035-02761-1, "CAP 2.2uF 10V -20% to +80% 0603 (1608 Metric) Thickness 1mm SMD", Case-EIA=0603, Case-Metric=1608, Rated Voltage="10 V", Tolerance="-20% to +80%", Max Thickness="1 mm", Technology=SMT
C26: library part CMP-1035-02306-1, "CAP 10nF 10V ±10% 0603 (1608 Metric) Thickness 1mm SMD", Case-EIA=0603, Case-Metric=1608, Rated Voltage="10 V", Tolerance=±10%, Max Thickness="1 mm", Technology=SMT
C27: library part CMP-1035-02799-1, "CAP 10uF 10V ±10% 0603 (1608 Metric) Thickness 1mm SMD", Case-EIA=0603, Case-Metric=1608, Rated Voltage="10 V", Tolerance=±10%, Max Thickness="1 mm", Technology=SMT
C29 C30 C32 C33: library part CMP-1037-04922-1, "CAP 4.7uF 35V ±10% 1206 (3216 Metric) Thickness 1.9mm SMD", Case-EIA=1206, Case-Metric=3216, Rated Voltage="35 V", Tolerance=±10%, Max Thickness="1.9 mm", Technology=SMT
C31: library part CMP-1035-00943-1, "CAP 33pF 50V ±5% 0603 (1608 Metric) Thickness 1mm SMD", Case-EIA=0603, Case-Metric=1608, Rated Voltage="50 V", Tolerance=±5%, Max Thickness="1 mm", Technology=SMT
C34: library part CMP-1035-02516-1, "CAP 47nF 100V ±10% 0603 (1608 Metric) Thickness 1mm SMD", Case-EIA=0603, Case-Metric=1608, Rated Voltage="100 V", Tolerance=±10%, Max Thickness="1 mm", Technology=SMT
C35: library part CMP-1035-02740-1, "CAP 1uF 25V ±10% 0603 (1608 Metric) Thickness 1mm SMD", Case-EIA=0603, Case-Metric=1608, Rated Voltage="25 V", Tolerance=±10%, Max Thickness="1 mm", Technology=SMT
CN1: "100 Base-TX (Fast Ethernet) SMD RJ45 single port (1x1) with LEDS Integrated Magnetics Connector", Manuf_1=HanRun, Manuf_2="Pulse Electronics Corporation", Manuf_3="K.O.D International Holding", Manuf_Part_1=HR961160C, Manuf_Part_2=J3011G21DNLT, Manuf_Part_3=RMT-119A-12F6-GY-04, Distrib="Sub Co"
D1: library part LED0, "led", Color=Red, Current - Test=20mA, Lens Color=Colorless, Manufacturer="Lite-On Inc.", Manufacturer Part Number=LTST-C171KRKT, Millicandela Rating=54mcd, Package / Case="0805 (2012 Metric)", Supplier Part Number 1=160-1427-1-ND, Voltage - Forward (Vf) (Typ)=2V, Category=Optoelectronics, ComponentLink1Description=http://optoelectronics.liteon.com/upload/download/DS22-2000-109/LTST-C171KRKT.pdf, ComponentLink1URL=http://optoelectronics.liteon.com/upload/download/DS22-2000-109/LTST-C171KRKT.pdf, Features=-, Height (Max)=0.80mm, Lens Style/Size="Rectangle with Flat Top, 1.40mm x 1.25mm", Lens Transparency=Clear, Mounting Type="Surface Mount", Packaging="Cut Tape (CT)", Part Status=Active, Pricing 1="1=0.31, 10=0.225, 25=0.1656, 100=0.1183, 250=0.0804, 500=0.07096, 1000=0.05558 (USD)", RoHS="RoHS Compliant", Size / Dimension="2.00mm L x 1.25mm W", Stock 1=260544, Supplier 1=Digi-Key, Viewing Angle=130°, Wavelength - Dominant=631nm, Wavelength - Peak=639nm
D2 D4: library part LED0, "led", Color=Green, Current - Test=20mA, Lens Color=Colorless, Manufacturer="Lite-On Inc.", Manufacturer Part Number=LTST-C171KGKT, Millicandela Rating=35mcd, Package / Case="0805 (2012 Metric)", Supplier Part Number 1=160-1426-1-ND, Voltage - Forward (Vf) (Typ)=2V, Category=Optoelectronics, ComponentLink1Description=http://optoelectronics.liteon.com/upload/download/DS22-2000-118/LTST-C171KGKT.pdf, ComponentLink1URL=http://optoelectronics.liteon.com/upload/download/DS22-2000-118/LTST-C171KGKT.pdf, Features=-, Height (Max)=0.90mm, Lens Style/Size="Rectangle with Flat Top, 1.40mm x 1.25mm", Lens Transparency=Clear, Mounting Type="Surface Mount", Packaging="Cut Tape (CT)", Part Status=Active, Pricing 1="1=0.31, 10=0.225, 25=0.1656, 100=0.1183, 250=0.0804, 500=0.07096, 1000=0.05558 (USD)", RoHS="RoHS Compliant", Size / Dimension="2.00mm L x 1.25mm W", Stock 1=350441, Supplier 1=Digi-Key, Viewing Angle=130°, Wavelength - Dominant=571nm, Wavelength - Peak=574nm
D3: Supplier Part Number 1=SBRT15U50SP5-13DICT-ND, Supplier 1=Digi-Key
D5: library part CMP-2000-07088-1, "Transient Voltage Suppression Diode, 30 V, -65 to 150 degC, 2-Pin SMD, RoHS, Tape and Reel", Capacitance @ Frequency=-, Current - Peak Pulse (10/1000µs)=8.3A, Manufacturer=Littelfuse-Inc., Operating Temperature=-55°C~150°C(TJ), Package / Case=DO-214AC,SMA, Package Description="2-Pin Surface Mount Device, Body 4.295 x 2.595 mm", Package Reference=DO-214AC, Power - Peak Pulse=400W, Power Line Protection=No, Supplier Device Package=DO-214AC(SMA), Voltage - Breakdown (Min)=33.3V, Voltage - Clamping (Max) @ Ipp=48.4V, Voltage - Reverse Standoff (Typ)=30V, Applications=GeneralPurpose, Bidirectional Channels=1, Category=CircuitProtection, Datasheet URL=http://www.littelfuse.com/~/media/electronics/datasheets/tvs_diodes/littelfuse_tvs_diode_smaj_datasheet.pdf.pdf, Datasheet Version=11/2015, Family=TVS-Diodes, Manufacturer URL=http://www.littelfuse.com/, Mounting Technology=SurfaceMount, Mounting Type=SurfaceMount, Packaging=Digi-Reel®, Series=SMAJ, Type=Zener, Unidirectional Channels=-
D6: library part CMP-1055-00528-1, "Dual Series Schottky Barrier Diodes, 3-Pin SOT-23, Tape and Reel", Manufacturer="On Semiconductor", ComponentLink1Description="Manufacturer URL", ComponentLink1URL=http://www.onsemi.com/, ComponentLink2Description=Datasheet, ComponentLink2URL=http://www.onsemi.cn/pub_link/Collateral/BAS40-04LT1-D.PDF, ComponentLink3Description="Package Specification", ComponentLink3URL=http://www.onsemi.cn/pub_link/Collateral/318-08.PDF, Configuration=Series, DatasheetVersion="Rev. 11", Mounting Technology="Surface Mount", PackageDescription="3-Pin Small Outline Transistor, Body 2.92 x 1.3 mm, Pitch 0.95 mm", PackageReference=SOT-23-3-318-08, PackageVersion="Rev. AP, 11/2009", Packing="Tape and Reel", PartNumber=BAS40-04LT1, RoHS=FALSE
F1: "FUSE BOARD MOUNT 500MA 63VAC/VDC", Supplier Part Number=F1454CT-ND, Datasheet URL=http://www.littelfuse.com/~/media/electronics/datasheets/fuses/littelfuse_fuse_466_datasheet.pdf.pdf, Part Number=0466.500NR, Supplier=DigiKey
FB1: library part CMP-0686-00744-2, "Chip Ferrite Bead for Power Lines, 600 Ohm, 1500 mA, -55 to 125 degC, 3.2 x 1.6 x 1.3 mm SMD, Tape and Reel", DC Resistance="0.08 Ohm Max.", Manufacturer=Murata, Operating Temperature Range="-55 to 125 degC", Rated Current="1500 mA", ComponentLink1Description="Manufacturer URL", ComponentLink1URL=http://www.murata.com/, ComponentLink2Description=Datasheet, ComponentLink2URL=http://www.murata.com/products/catalog/pdf/c31e.pdf, ComponentLink3Description="Package Specification", ComponentLink3URL=http://www.murata.com/products/catalog/pdf/c31e.pdf, DatasheetVersion=08/2013, Impedance (at 100 MHz)="600 Ohm +/- 25%", Mounting Technology="Surface Mount", PackageDescription="2-Pin Chip, Body 3.2 x 1.6 mm", PackageReference=BLM31-2, Packing="Tape and Reel", PartNumber=BLM31PG601SN1L
J1: library part "jtag 10pos mini", Supplier Part Number 1=1175-1629-ND, Supplier 1=Digi-Key
J2 J3: library part Jumper, "Jumper"
L1: library part Inductor, "Inductor", Published=8-Jun-2000, Publisher="Altium Limited", Revision="July-2002: Re-released for DXP Platform."
L2: library part SRP5030TA, DC Resistance (DCR)="76.2 mOhm Max", Manufacturer="Bourns Inc.", Manufacturer Part Number=SRP5030TA-6R8M, Operating Temperature="-40°C ~ 150°C", Package / Case=Nonstandard, Q @ Freq="15 @ 100kHz", Ratings=AEC-Q200, Supplier Device Package=-, Supplier Part Number 1=SRP5030TA-6R8MCT-ND, Tolerance=±20%, Category="Inductors, Coils, Chokes", ComponentLink1Description=http://www.bourns.com/docs/Product-Datasheets/SRP5030TA.pdf, ComponentLink1URL=http://www.bourns.com/docs/Product-Datasheets/SRP5030TA.pdf, Height - Seated (Max)="0.118\" (3.00mm)", Material - Core="Carbonyl Powder", Mounting Type="Surface Mount", Packaging="Cut Tape (CT)", Part Status=Active, Pricing 1="1=1.51, 10=1.397, 100=0.9781, 500=0.79178, 1000=0.72191 (USD)", RoHS="RoHS Compliant", Shielding=Shielded, Size / Dimension="0.224\" L x 0.205\" W (5.70mm x 5.20mm)", Stock 1=5626, Supplier 1=Digi-Key, Type=Wirewound
P1 P2: library part "8-Pin 2-Row Nano-Fit", "NanoFit RA Hdr TH DR 8Ckt", Manufacturer=Molex, Part Number=105314-1216, Supplier Part Number=WM15165-ND, Supplier Part Number 1=WM15168-ND, Supplier=Digi-Key, Supplier 1=Digi-Key
P3 P4: library part "4-Pin Nano-Fit", "NanoFit RA Hdr TH SR 4Ckt", Manufacturer=Molex, Part Number=105313-1204, Supplier Part Number=538-105313-1204, Supplier=Mouser
R1 R2 R6 R7: library part Res_50_1%_0603, "Resistor,50,0603,1%,YAGEO", Manuf_1=YAGEO, Manuf_Part_1=RC0402FR-0750RL, Distrib=FARNELL, ECCN_US/EU=n/a
R3 R4 R5 R10 R18 R29: library part CMP-1012-00623-1, "10K 0.1W 1% 0603 (1608 Metric)  SMD", Case-EIA=0603, Case-Metric=1608, Power="0.1 W", Tolerance="1 %", Technology=SMT
R8 R9 R15 R19: library part CMP-1012-00038-1, "33R 0.1W 5% 0603 (1608 Metric)  SMD", Case-EIA=0603, Case-Metric=1608, Power="0.1 W", Tolerance="5 %", Technology=SMT
R11 R12 R13 R14: library part CMP-1012-00383-1, "75R 0.1W 1% 0603 (1608 Metric)  SMD", Case-EIA=0603, Case-Metric=1608, Power="0.1 W", Tolerance="1 %", Technology=SMT
R16: library part CMP-1012-00632-1, "12K1 0.1W 1% 0603 (1608 Metric)  SMD", Case-EIA=0603, Case-Metric=1608, Power="0.1 W", Tolerance="1 %", Technology=SMT
R17: library part CMP-1012-00078-1, "1K5 0.1W 5% 0603 (1608 Metric)  SMD", Case-EIA=0603, Case-Metric=1608, Power="0.1 W", Tolerance="5 %", Technology=SMT
R20 R21 R22: library part CMP-1012-00060-1, "270R 0.1W 5% 0603 (1608 Metric)  SMD", Case-EIA=0603, Case-Metric=1608, Power="0.1 W", Tolerance="5 %", Technology=SMT
R23 R25: library part CMP-1012-00098-1, "10K 0.1W 5% 0603 (1608 Metric)  SMD", Case-EIA=0603, Case-Metric=1608, Power="0.1 W", Tolerance="5 %", Technology=SMT
R24 R26 R27: library part CMP-1012-00050-1, "100R 0.1W 5% 0603 (1608 Metric)  SMD", Case-EIA=0603, Case-Metric=1608, Power="0.1 W", Tolerance="5 %", Technology=SMT
R28: library part CMP-1012-00703-1, "51K 0.1W 1% 0603 (1608 Metric)  SMD", Case-EIA=0603, Case-Metric=1608, Power="0.1 W", Tolerance="1 %", Technology=SMT
R30: library part CMP-1012-00123-1, "110K 0.1W 5% 0603 (1608 Metric)  SMD", Case-EIA=0603, Case-Metric=1608, Power="0.1 W", Tolerance="5 %", Technology=SMT
R31: library part CMP-1012-00660-1, "22K1 0.1W 1% 0603 (1608 Metric)  SMD", Case-EIA=0603, Case-Metric=1608, Power="0.1 W", Tolerance="1 %", Technology=SMT
R32: library part CMP-1012-00510-1, "1K 0.1W 1% 0603 (1608 Metric)  SMD", Case-EIA=0603, Case-Metric=1608, Power="0.1 W", Tolerance="1 %", Technology=SMT
R33: library part Res3, "Resistor", Case/Package=1206, Case Code (Metric)=3216, Manufacturer 1=Susumu, Manufacturer Part Number 1=RL1632R-1R00-F, Max Operating Temperature=125°C, Max Power Dissipation=500mW, Min Operating Temperature=-55°C, Package Quantity=1, Resistance=1R, Supplier Part Number 1=RL16R1.0FCT-ND, Temperature Coefficient=100ppm/°C, Tolerance=1%, Case Code (Imperial)=1206, ComponentLink1Description=https://datasheet.ciiva.com/2490/rl-data-sheet-2490384.pdf, ComponentLink1URL=https://datasheet.ciiva.com/2490/rl-data-sheet-2490384.pdf, ComponentLink2Description=https://datasheet.ciiva.com/12838/e-15-16-12838646.pdf, ComponentLink2URL=https://datasheet.ciiva.com/12838/e-15-16-12838646.pdf, ComponentLink3Description=https://datasheet.ciiva.com/2490/rl-data-sheet-2490382.pdf, ComponentLink3URL=https://datasheet.ciiva.com/2490/rl-data-sheet-2490382.pdf, ComponentLink4Description=https://datasheet.ciiva.com/2490/rl-data-sheet-2490383.pdf, ComponentLink4URL=https://datasheet.ciiva.com/2490/rl-data-sheet-2490383.pdf, Composition="Thin Film", Height=0.026inch, LatestRevisionDate=29-May-2009, LatestRevisionNote="IPC-7351 Footprint Added.", Lead Free="Lead Free", Length=0.126inch, Number of Terminations=2, PackageDescription="Chip Resistor", PackageReference=J1-0603, Packaging="Tape and Reel", Power Rating=500mW, Pricing 1="1=0.68, 10=0.485, 25=0.3784, 50=0.3202, 100=0.2523, 250=0.2134, 500=0.1746, 1000=0.1358 (USD)", Published=8-Jun-2000, Publisher="Altium Limited", Stock 1=37831, Supplier 1=Digi-Key, Termination=SMD/SMT, Weight=0.000571oz, Width=0.063inch
S1: library part "EVP-AA Switch", "EVP-AA Momentary Switch SPST-NO", Part Number=EVP-AA202K, Supplier Part Number 1=P13348SCT-ND, Datasheet=http://industrial.panasonic.com/lecs/www-data/pdf/ATK0000/ATK0000CE26.pdf, Supplier 1=Digi-Key
SB1: library part "Circuit Breaker_close", "Circuit Breaker", Published=24-Mar-1999, Publisher="Altium Limited", Revision="July-2002: Re-released for DXP Platform."
SB2 SB3: library part "Circuit Breaker", "Circuit Breaker", Published=24-Mar-1999, Publisher="Altium Limited", Revision="July-2002: Re-released for DXP Platform."
U1 U3: library part CMP-0055-00919-3, "Low Power Quad Operational Amplifier, 14-pin CerPACK", Manufacturer="Texas Instruments", Package Reference=NAC0014A, PackageTopMarking="NSZSSXXYYA*LM124AWG/*883 Q*7704302XA", PowerWise=N, ComponentLink1Description="Datasheet URL", ComponentLink1URL=http://www.ti.com/general/docs/lit/getliterature.tsp?genericPartNumber=LM124AQML&fileType=pdf, CompType=Amplifiers, High-Reliability=Y, PackageDescription="Cerpack, .390 x .250 x .070in, 14 Lead, .050in Pitch, Gull Wing", PartId=1, PinCount=14, RoHS=N
U2: library part "TI LSF0108-Q1", ComponentLink1Description=digikey, ComponentLink1URL=https://www.digikey.com/product-detail/en/texas-instruments/LSF0108QPWRQ1/296-44247-1-ND/6098479
U6: "LAN8742A-CZ-TR - Small Footprint RMII 10/100 Ethernet, Transceiver with HP Auto-MDIX and flexPWR Technology SQFN-24", Manuf_1=MICROCHIP, Distrib=MICROCHIP, Manuf_Part_1=LAN8742A-CZ-TR, Order=LAN8742A-CZ-TR
U7: "Imported", Manufacturer_Part_Number=stm32h7x3vit, Copyright="Copyright (C) 2016 Accelerated Designs. All rights reserved", RefDes=RefDes, Type=DEV, Vendor=STMicroelectronics
U8: Current - Output=3A, Frequency - Switching=400kHz, Manufacturer="Texas Instruments", Manufacturer Part Number=LMR23630AFQDDARQ1, Operating Temperature="-40°C ~ 125°C (TJ)", Package / Case="8-SOIC (0.154\", 3.90mm Width) Exposed Pad", Supplier Device Package="8-SO PowerPad", Supplier Part Number 1=296-45260-6-ND, Voltage - Input (Max)=36V, Voltage - Input (Min)=4.5V, Voltage - Output (Max)=28V, Voltage - Output (Min/Fixed)=1V, Category="Integrated Circuits (ICs)", ComponentLink1Description=http://www.ti.com/lit/ds/symlink/lmr23630-q1.pdf, ComponentLink1URL=http://www.ti.com/lit/ds/symlink/lmr23630-q1.pdf, Function=Step-Down, Mounting Type="Surface Mount", Number of Outputs=1, Output Configuration=Positive, Output Type=Adjustable, Packaging=Digi-Reel®, Part Status=Active, Pricing 1="1=3.97, 10=3.564, 100=2.9204, 500=2.48604, 1000=2.09667 (USD)", RoHS="RoHS Compliant", Stock 1=1636, Supplier 1=Digi-Key, Synchronous Rectifier=Yes, Topology=Buck
U9: library part CMP-0055-01048-3, "General Purpose, Low Voltage, Rail-to-Rail Output Operational Amplifiers, 5-pin SOT-23", Manufacturer="Texas Instruments", Package Reference=DBV0005A, PackageTopMarking=A13*XTT, PowerWise=N, ComponentLink1Description="Datasheet URL", ComponentLink1URL=http://www.ti.com/general/docs/lit/getliterature.tsp?genericPartNumber=LMV321-N&fileType=pdf, CompType=Amplifiers, PackageDescription="Molded SOT-23, .115 x .063 x .040 in Body, 5 Lead, .0375 in Pitch", PinCount=5, RoHS=N
U10: library part CMP-0704-00014-2, "Voltage Output High-Side Measurement Current Shunt Monitor, 2.7 to 18 V, -40 to 125 degC, 5-pin SOT23 (DBV5), Green (RoHS & no Sb/Br)", Manufacturer="Texas Instruments", Quiescent Current (+/-)(Typ)(mA)=0.7, Rating=Catalog, CMRR(Min)(dB)=80, Code_JEDEC=MO-178, Common Mode Range(Max)(V)=80, Common Mode Range(Min)(V)=-16, ComponentLink1Description="Manufacturer URL", ComponentLink1URL=http://www.ti.com/, ComponentLink2Description=Datasheet, ComponentLink2URL=http://www.ti.com/general/docs/lit/getliterature.tsp?genericPartNumber=INA196&fileType=pdf, ComponentLink3Description="Package Specification", ComponentLink3URL=http://www.ti.com/lit/ml/mpds018j/mpds018j.pdf, DatasheetVersion=SBOS307F, Eco-Plan="Green (RoHS & no Sb/Br)", Gain(V/V)=20, Input Offset (+/-)(Max)(uV)=2000, Mounting Technology="Surface Mount", Output Type=Voltage, PackageDescription="5-Pin Plastic Small Outline, Body 1.6 x 2.9 mm, Pitch 0.95 mm", PackageReference=DBV0005A, PackageVersion="4073253-4/K, 03/2006", PartNumber=INA196AIDBVR, Small-Signal Bandwidth(Typ)(MHz)=0.5, SubFamily="Current Shunt Monitor", Vs(Max)(V)=18, Vs(Min)(V)=2.7
X1: library part XTAL_5032, "Crystal Oscillator", LatestRevisionDate=17-Jul-2002, LatestRevisionNote="Re-released for DXP Platform.", PackageReference=R38, Published=8-Jun-2000, Publisher="Altium Limited"
Y1: library part CMP-2000-07595-1, "Crystal Unit, 8 MHz, 8 pF, -40 to 150 degC, 2-Pin SMD, RoHS, Tape and Reel", Case/Package=SMD/SMT, ESR (Equivalent Series Resistance)=500Ohm, Frequency=8MHz, Frequency Stability=150ppm, Frequency Tolerance=50ppm, Load Capacitance=8pF, Manufacturer=NDK, Max Operating Temperature=150degC, Min Operating Temperature=-40degC, Package Description="2-Pin Surface Mount Device, Body 3.2 x 2.5 mm", Package Quantity=3000, Datasheet URL=http://www.ndk.com/images/products/catalog/c_NX3225GD-STD-CRA-3_e.pdf, Datasheet Version=11/2016, Height=0.039inch, Length=0.126inch, Manufacturer URL=http://www.ndk.com/en/, Mount=SurfaceMount, Mounting Technology=SurfaceMount, Number of Pins=2, Package Reference=NX3225GD-8MHZ-STD-CRA-3, Packaging=TapeandReel, RoHSCompliant=True, Width=0.098inch

## Via types
v1: diameter 32, hole 16, Component Side to Solder Side, 84 vias
v2: diameter 32, hole 16, Component Side to Solder Side, tented both sides, 38 vias
v3: diameter 19.68, hole 7.87, Component Side to Solder Side, tented top, 6 vias
v4: diameter 25.98, hole 12.99, Component Side to Solder Side, 2 vias

## Nets (pads, with @x,y where several pads share a name; then routed paths per layer and width w, separated by ;. In a path a pad name is that pad's centre, name@x,y a point inside that pad or via, vN(x,y) a via of type N, cw(c..) or ccw(c..) an arc to the next point about the centre after c; other vN are vias at no path point)
BOOT0: J2.1 R25.1 U7.94 | length 159.6
  Component Side w10: J2.1@2186.93,2770 2186.93,2720.08 R25.1@2184.96,2718.11 2247.24,2718.11 2252.28,2723.15 U7.94@2289.76,2723.15